# Altium PCB OBDII-Ist.PcbDoc
Units mm, origin at the board's own origin, x right, y up, seen from the top; angles counter-clockwise.
Board outline 51.9 x 40.3 mm, 2 copper layers (Top, Bottom); 77 components, 65 nets, 293 pads, 47 vias.
Unrouted connection lines stored in the file: 4.
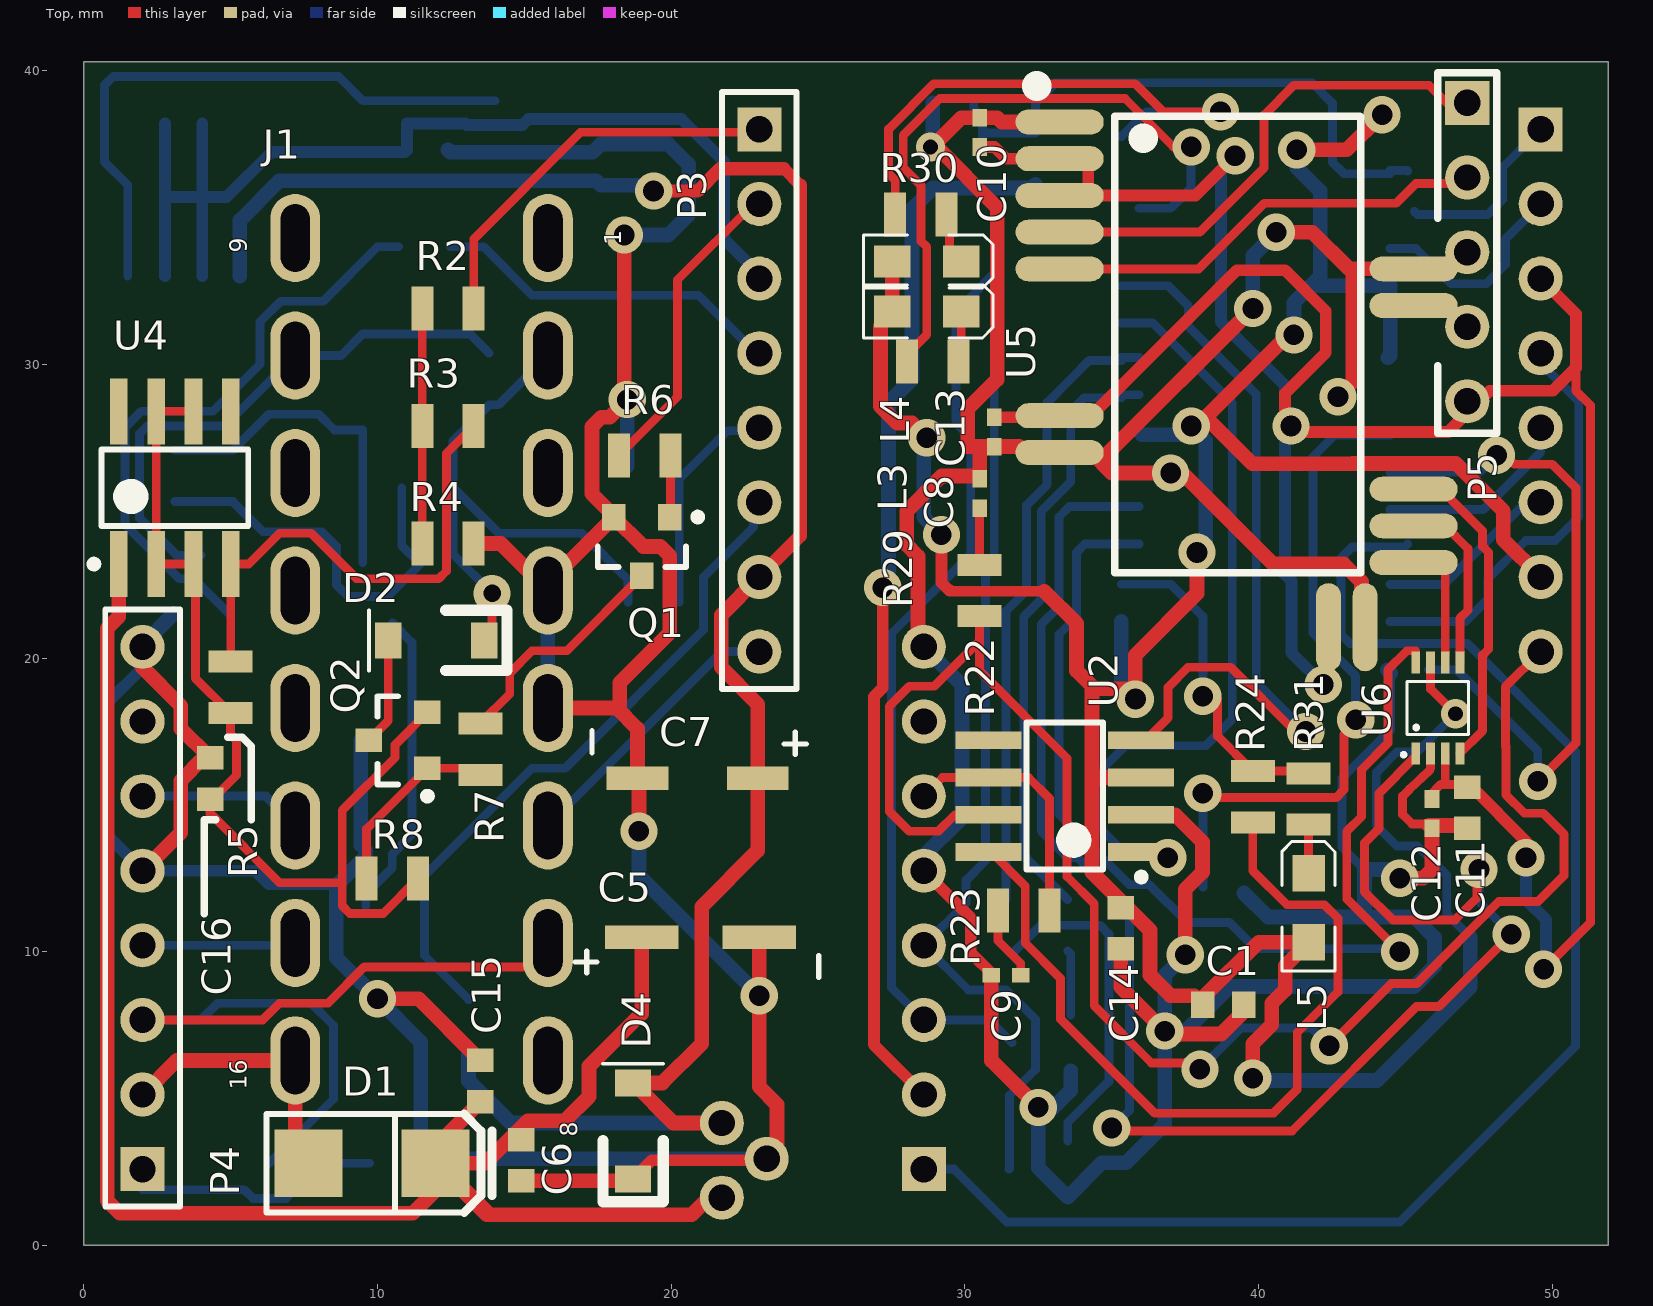
[diagram p0: Top view]
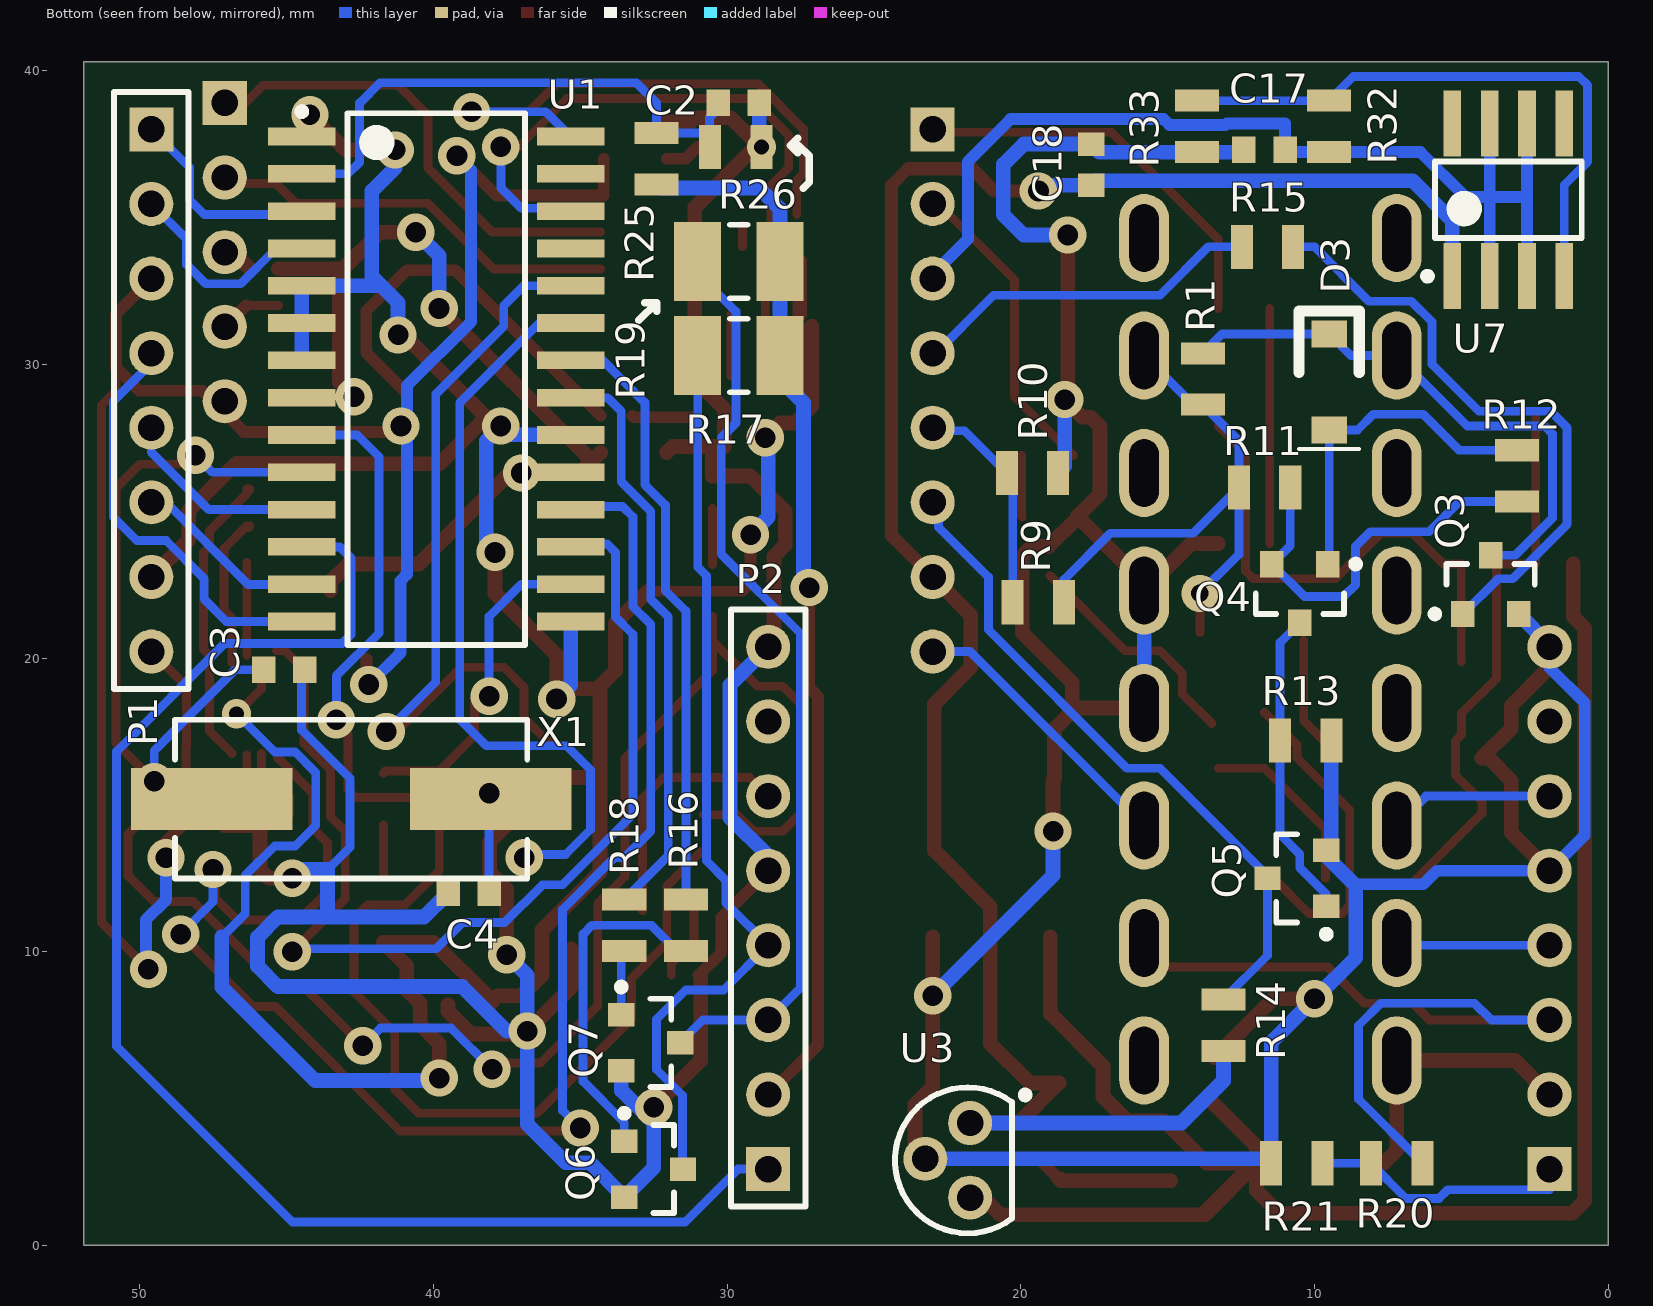
[diagram p1: Bottom view, seen from below]

## Layer stack, top to bottom
Top: signal copper 0.0356
Dielectric: core 0.32, FR-4, Dk 4.8
Bottom: signal copper 0.0356

## Board outline
0,0 0,40.3 51.9,40.3 51.9,0

## Design rules (kind name [scope] priority, off if disabled: settings)
Clearance [All] p1: gap=0.175
ComponentClearance [All] p1: gap=0.254 collisioncheckmode=3 verticalgap=0.2 showdistances=FALSE
PolygonConnect [All] p1: connectstyle=Relief reliefconductorwidth=0.254 reliefentries=4 polygonreliefangle="90 Angle" airgapwidth=0.254
RoomDefinition OBDII-Ist [InComponentClass('OBDII-Ist')] p1: confinementstyle=ConfineIn formatcopy=TRUE lockcomponents=FALSE outline -40,-40 10.8,-40 10.8,-14.6 -40,-14.6
RoutingVias [All] p1: holewidth=0.7 width=1.27 viastyle="Through Hole" minholewidth=0.3 minwidth=1.27 maxholewidth=0.7 maxwidth=1.27
SilkscreenOverComponentPads [All] p1: minsilkscreentomaskgap=0.254
SolderMaskExpansion [All] p1: expansion=0.102
Width Width_GND [InNet('GND')] p1: maxlimit=0.5 minlimit=0.2 preferedwidth=0.5
Width Width_5V [InNet('+5V')] p2: maxlimit=0.5 minlimit=0.2 preferedwidth=0.5
Width Width_3.3V [InNet('+3.3V')] p3: maxlimit=0.5 minlimit=0.2 preferedwidth=0.5
Width Width_12V [InNet('+12V')] p4: maxlimit=0.5 minlimit=0.2 preferedwidth=0.5
Width Width_VBAT [InNet('VBAT')] p5: maxlimit=0.5 minlimit=0.2 preferedwidth=0.5
Width [All] p6: maxlimit=0.3 minlimit=0.2 preferedwidth=0.3
26 further rules are at their usual default settings.

## Classes and differential pairs
component class Power_: C5 C6 C7 C15 C16 C17 C18 D1 D2 D3 D4 J1 P3 P4 Q1 Q2 Q3 Q4 Q5 R1 R2 R3 R4 R5 R6 R7 R8 R9 R10 R11 R12 R13 R14 R15 R20 R21 R32 R33 U3 U4 U7
component class OBDII-Ist: C1 C2 C3 C4 C8 C9 C10 C11 C12 C13 C14 L3 L4 L5 P1 P2 P5 Q6 Q7 R16 R17 R18 R19 R22 R23 R24 R25 R26 R29 R30 R31 U1 U2 U5 U6 X1

## Components (designator, comment, footprint, x,y, rotation, side; value= is the part's Value field where it differs from the comment)
C1 "0.1uF" 1608[0603] 38.8,8.2 r0 top
C2 "0.1uF" 1608[0603] 29.6,38.9 r180 bottom
C3 "27pF" 1608[0603] 45.072,19.6 r180 bottom
C4 "27pF" 1608[0603] 38.8,12 r0 bottom
C5 "2.2uF" Panasonic_Ñ 21,10.5 r270 top
C6 "0.1uF" 1608[0603] 14.9,2.9 r90 top
C7 "10uF" Panasonic_B 20.9,15.9 r90 top
C8 "560pF" 0402 30.5,25.6 r270 top
C9 "560pF" 0402 31.4,9.2 r0 top
C10 "X5R/16V" 0402 30.5,37.9 r90 top
C11 "0.1uF" 1608[0603] 47.1,14.9 r270 top
C12 "X5R/16V" 0402 45.9,14.7 r90 top
C13 "X5R/16V" 0402 31,27.7 r90 top
C14 "0.1uF" 1608[0603] 35.3,10.8 r270 top
C15 "0.1uF" 1608[0603] 13.5,5.6 r270 top
C16 "0.1uF" 1608[0603] 4.3,15.9 r270 top
C17 "0.1uF" 1608[0603] 11.7,37.3 r180 bottom
C18 "0.1uF" 1608[0603] 17.6,36.8 r270 bottom
D1 "FM4001-W" SMA,2.8mm 9.8,2.8 r0 top
D2 "MMSD4148T1G" SOD123 12,20.6 r0 top
D3 "MMSD4148T1G" SOD123 9.5,29.4 r90 bottom
D4 "MMSZ5232B" SOD123 18.7,3.9 r270 top
J1 "DEV-09911" "DEV-09911 - II" 11.5,20.3 r90 top
L3 "APT2012SYCK" LED-0805 28.7,31.8 r0 top
L4 "APT2012SYCK" LED-0805 28.7,33.5 r0 top
L5 "APT2012SYCK" LED-0805 41.7,11.5 r90 top
P1 "68000-108HLF" HDR1X8 49.6,38 r270 bottom
P2 "68000-108HLF" HDR1X8 28.6,2.6 r90 bottom
P3 "66951-008LF" HDR1X8 23,38 r270 top
P4 "66951-008LF" HDR1X8 2,2.6 r90 top
P5 "Header 5" HDR1X5 47.1,38.9 r270 top
Q1 "MMBT3904LT1G" SOT23 19,23.8 r270 top
Q2 "MMBT3906LT1G" SOT23 10.7,17.2 r180 top
Q3 "MMBT3904LT1G" SOT23 4,22.5 r90 bottom
Q4 "MMBT3906LT1G" SOT23 10.5,22.2 r270 bottom
Q5 "MMBT3904LT1G" SOT23 10.6,12.5 r0 bottom
Q6 "MMBT3904LT1G" SOT23 32.5,2.6 r180 bottom
Q7 "MMBT3904LT1G" SOT23 32.6,6.9 r180 bottom
R1 "22k" ERA-0805 13.8,29.5 r270 bottom
R2 "2.2k" ERA-0805 12.4,31.9 r0 top
R3 "470R" ERA-0805 12.4,27.9 r180 top
R4 "2.2k" ERA-0805 12.4,23.9 r180 top
R5 "470R" ERA-0805 5,19 r270 top
R6 "4.7k" ERA-0805 19.1,26.9 r180 top
R7 "4.7k" ERA-0805 13.5,16.9 r90 top
R8 "10k" ERA-0805 10.5,12.5 r0 top
R9 "10k" ERA-0805 19.4,21.9 r180 bottom
R10 "22k" ERA-0805 19.6,26.3 r0 bottom
R11 "10k" ERA-0805 11.7,25.8 r180 bottom
R12 "47k" ERA-0805 3.1,26.2 r270 bottom
R13 "10k" ERA-0805 10.3,17.2 r180 bottom
R14 "4.7k" ERA-0805 13.1,7.5 r90 bottom
R15 "4.7k" ERA-0805 11.6,34 r0 bottom
R16 "2.2k" ERA-0805 31.4,10.9 r90 bottom
R17 "510R" ERJ-1210 29.6,30.3 r180 bottom
R18 "2.2k" ERA-0805 33.5,10.9 r90 bottom
R19 "510R" ERJ-1210 29.6,33.5 r180 bottom
R20 "47k" ERA-0805 7.2,2.8 r180 bottom
R21 "33k" ERA-0805 10.6,2.8 r180 bottom
R22 "100R" ERA-0805 30.5,22.3 r270 top
R23 "100R" ERA-0805 32,11.4 r0 top
R24 "4.7k" ERA-0805 39.8,15.275 r90 top
R25 "47k" ERA-0805 32.4,37 r270 bottom
R26 "10k" ERA-0805 29.7,37.4 r0 bottom
R29 "470R" ERA-0805 28.9,30.1 r0 top
R30 "470R" ERA-0805 28.5,35.1 r0 top
R31 "470R" ERA-0805 41.7,15.2 r270 top
R32 "560" ERA-0805 9.5,38.1 r90 bottom
R33 "750" ERA-0805 14,38.1 r90 bottom
U1 "ELM327SM" SOIC127P1030X264-28N 39.9,29.5 r180 bottom
U2 "MCP2551-I/SN" SOIC8N 33.4,15.3 r180 top
U3 "LP2950-50LPRE3" TO-92 21.8,2.9 r180 bottom
U4 "LM317LM/NOPB" SOIC8N 3.1,25.8 r90 top
U5 "BLE112-A" "BLE112-A - II" 39.2,30.7 r0 top
U6 "TXB0102DCUR" TXB0102DCUR 46.1,18.3 r90 top
U7 "LM317LM/NOPB" SOIC8N 3.4,35.6 r90 bottom
X1 "ABLS-4.000MHZ-B2-T" HC-49/US 42.8,15.2 r180 bottom

## Footprints (in the part's own frame and the unit in brackets; to place one, negate y for a bottom-side part, rotate by r counter-clockwise, add the part's x,y. Pads: shape width x height; smd on the part's side, far side on the other; paste and mask are expansions set on the pad)
0402 [mm] "Chip Capacitor, Body 1.0x0.5mm, IPC High Density"
  rect 0.6x0.5 smd: 1(-0.5,0) 2(0.5,0)
  body extent -0.55,-0.3 0.55,0.3, height 1.3
1608[0603] [mm] "Chip Capacitor, Body 1.6x0.8mm, IPC High Density"
  rect 0.8x0.9 smd: 1(-0.7,0) 2(0.7,0)
  body extent -0.87,-0.48 0.87,0.48, height 1.3
"BLE112-A - II" [mm] "BLE112 Bluetooth Smart Module"
  round 0.85 smd: 1(-7.05,7.55) 1(-4.9,7.55) 2(-7.05,6.3) 2(-4.9,6.3) 3(-7.05,5.05) 3(-4.9,5.05) 4(-7.05,3.8) 4(-4.9,3.8) 5(-7.05,2.55) 5(-4.9,2.55) 9(-7.05,-2.45) 9(-4.9,-2.45) 10(-7.05,-3.7) 10(-4.9,-3.7) 20(3.175,-10.725) 20(3.175,-8.575) 21(4.425,-10.725) 21(4.425,-8.575) 22(5,-7.45) 22(7.15,-7.45) 23(5,-6.2) 23(7.15,-6.2) 24(5,-4.95) 24(7.15,-4.95) 29(5,1.3) 29(7.15,1.3) 30(5,2.55) 30(7.15,2.55)
  rect 2.15x0.85 smd: 1(-5.975,7.55) 2(-5.975,6.3) 3(-5.975,5.05) 4(-5.975,3.8) 5(-5.975,2.55) 9(-5.975,-2.45) 10(-5.975,-3.7) 22(6.075,-7.45) 23(6.075,-6.2) 24(6.075,-4.95) 29(6.075,1.3) 30(6.075,2.55)
  rect 0.85x2.15 smd: 20(3.175,-9.65) 21(4.425,-9.65)
  silkscreen extent -6.76,-7.8 4.27,8.78, body extent -5.98,-9.65 6.08,8.45, height 2.3
"DEV-09911 - II" [mm] "OBD-II Connector"
  oval 3x1.7 hole 1 slot 2.3 at 0 deg: 1(14,-4.3) 2(10,-4.3) 3(6,-4.3) 4(2,-4.3) 5(-2,-4.3) 6(-6,-4.3) 7(-10,-4.3) 8(-14,-4.3) 9(14,4.3) 10(10,4.3) 11(6,4.3) 12(2,4.3) 13(-2,4.3) 14(-6,4.3) 15(-10,4.3) 16(-14,4.3)
  body extent -14.85,-4.7 14.85,4.7, height 4.1
ERA-0805 [mm] "Chip Resistor; Body 2 x 1.25 mm"
  rect 0.75x1.5 smd: 1(-0.875,0) 2(0.875,0)
  body extent -1,-0.63 1,0.63, height 0.5
ERJ-1210 [mm] "Chip Resistor; Body 3.2 x 2.5 mm (LxW typ)"
  rect 1.6x2.7 smd: 1(-1.4,0) 2(1.4,0)
  silkscreen extent -0.3,-1.25 0.3,1.25
HC-49/US [mm]
  rect 5.5x2.1 smd: 1(-4.75,0) 2(4.75,0)
  silkscreen extent -6,-2.7 6,2.7, body extent -5.7,-2.4 5.7,2.4, height 4.3
HDR1X5 [mm] "Connector; Header; 5 Position"
  rect 1.5x1.5 hole 0.9: 1(0,0)
  round 1.5 hole 0.9: 2(2.54,0) 3(5.08,0) 4(7.62,0) 5(10.16,0)
  silkscreen extent -1.02,-1 11.25,1
HDR1X8 [mm] "Connector; Header; 8 Position"
  rect 1.5x1.5 hole 0.9: 1(0,0)
  round 1.5 hole 0.9: 2(2.54,0) 3(5.08,0) 4(7.62,0) 5(10.16,0) 6(12.7,0) 7(15.24,0) 8(17.78,0)
  silkscreen extent -1.27,-1.27 19.05,1.27
LED-0805 [mm] "LED, Body 2 x 1.25 mm"
  rect 1.25x1.1 smd: 1(-1.175,0) 2(1.175,0)
  silkscreen extent -2.15,-0.9 2.25,0.9, body extent -1,-0.63 1,0.63, height 0.75
Panasonic_B [mm] "Panasonic Ñ size code electrolytic capacitor"
  rect 0.8x2.1 smd paste+0: 1(0,-2.05)
  rect 0.8x2.1 smd: 2(0,2.05)
  silkscreen extent 0.82,-3.7 1.63,3.6
Panasonic_Ñ [mm] "Panasonic Ñ size code electrolytic capacitor"
  rect 0.8x2.5 smd paste+0: 1(0,-2)
  rect 0.8x2.5 smd: 2(0,2)
  silkscreen extent 0.47,-4.28 1.38,4.03
SMA,2.8mm [mm] "DO-214AC/SMA"
  rect 2.3x2.3 smd: 1(-2.15,0) 2(2.175,0)
  silkscreen extent -3.57,-1.68 4.1,1.68, body extent -2.6,-1.3 2.6,1.3, height 2.39
SOD123 [mm] "Diode SOD123, Gull-wing"
  rect 0.91x1.22 smd: 1(-1.635,0) 2(1.635,0)
  silkscreen extent -2.29,-1.02 2.41,1.02, body extent -1.85,-0.8 1.85,0.8, height 1.27
SOIC8N [mm] "SOIC, 8-Leads, Body 5.0x4.0mm (max), Pitch 1.27mm, IPC Medium Density"
  rect 2.25x0.6 smd: 1(-2.6,1.905) 2(-2.6,0.635) 3(-2.6,-0.635) 4(-2.6,-1.905) 5(2.6,-1.905) 6(2.6,-0.635) 7(2.6,0.635) 8(2.6,1.905)
  silkscreen extent -2.73,-2.5 1.3,2.88, body extent -2,-2.5 2,2.5, height 1.75
SOIC127P1030X264-28N [mm] "SOIC, 28-Leads, Body 18.1x7.6mm (max), Pitch 1.27mm, IPC Medium Density"
  rect 2.3x0.6 smd: 1(-4.575,8.255) 2(-4.575,6.985) 3(-4.575,5.715) 4(-4.575,4.445) 5(-4.575,3.175) 6(-4.575,1.905) 7(-4.575,0.635) 8(-4.575,-0.635) 9(-4.575,-1.905) 10(-4.575,-3.175) 11(-4.575,-4.445) 12(-4.575,-5.715) 13(-4.575,-6.985) 14(-4.575,-8.255) 15(4.575,-8.255) 16(4.575,-6.985) 17(4.575,-5.715) 18(4.575,-4.445) 19(4.575,-3.175) 20(4.575,-1.905) 21(4.575,-0.635) 22(4.575,0.635) 23(4.575,1.905) 24(4.575,3.175) 25(4.575,4.445) 26(4.575,5.715) 27(4.575,6.985) 28(4.575,8.255)
  silkscreen extent -4.7,-9.05 3.03,9.23, body extent -3.79,-9.04 3.8,9.04, height 2.64
SOT23 [mm] "SOT23, 3-Leads, Body 3.0x2.6mm, Pitch 0.95mm"
  rect 0.9x0.8 smd: 1(-1,0.95) 2(-1,-0.95) 3(1,0)
  silkscreen extent -1.12,-1.5 0.7,2.03, body extent -1.25,-1.46 1.23,1.46, height 1.01
TO-92 [mm] "TO, Flat Index; 3 In-Line, Axial Leads; Body Dia. 4.5mm; Leads 0.51 x 0.48 mm (max)"
  round 1.5 hole 0.9: 1(0.075,1.27) 2(-1.45,0.05) 3(0.075,-1.27)
  silkscreen extent -2.48,-2.48 2.07,2.48, body extent -2.5,-2.5 1.5,2.5, height 6.86
TXB0102DCUR [mm] "2-Bit Bidirectional Voltage-Level Translator with Auto Direction Sensing and +/-15-kV ESD Protect"
  rect 0.75x0.3 smd: 1(-1.55,0.75) 2(-1.55,0.25) 3(-1.55,-0.25) 4(-1.55,-0.75) 5(1.55,-0.75) 6(1.55,-0.25) 7(1.55,0.25) 8(1.55,0.75)
  silkscreen extent -1.6,-1.04 0.9,1.17, body extent -1.2,-1.05 1.2,1.05, height 0.9

## Part data
C1 C2 C11 C14 C15 C16: library part CGA3E2X7R1E104K080AA, "Surface-Mount Ceramic Multilayer Capacitor, 0.1uF, X7R, 10% Tolerance, 0603 Size, 25V"
C3 C4: library part CC0603JRNPO9BN270, "Surface-Mount Ceramic Multilayer Capacitor, 27pF, 5% Tolerance, 0603 Size, 50V"
C5: library part EEE-1HA2R2NR, "CAP ELECT 2.2UF SV 50V SMD"
C6 C17 C18: library part C0603C104K5RACTU, "Surface-Mount Ceramic Multilayer Capacitor, 0.1uF, 10% Tolerance, 0603 Size, 50V"
C7: library part EEE-1AA100NR, "CAP ELECT 10UF SV 10V SMD"
C8 C9: library part C0402C561J5GACTU, "Surface-Mount Ceramic Multilayer Capacitor, 560pF, 5% Tolerance, 0402 Size, 50V"
C10 C12 C13: library part "Cap Semi", "Capacitor (Semiconductor SIM Model)"
D1: "1 Amp 50V  Rectifier"
D2 D3: "High Conductance Fast Diode"
D4: "Zener Diodes 5.6 Volt 0.5W 5%"
J1: library part OBDII_DEV-09911, "OBD-II Connector"
L3 L4 L5: "Typical BLUE SiC LED"
P1 P2: "Header, 8-Pin, 2.54 pitch, 1 row"
P3 P4: "Connector, 8-Pin, 2.54 pitch, 1 row"
P5: "Header, 5-Pin"
Q1 Q3 Q5 Q6 Q7: library part MMBT3904L, "NPN 3904 General Purpose Amplifier"
Q2 Q4: library part MMBT3906L, "PNP 3906 General Purpose Amplifier"
R1 R10: library part ERA6AEB223V, "Rectangular Thick Film Chip Resistor, 22 kOhm, 0.1% Tolerance, 0805 Size, 0.125 W"
R2 R4 R16 R18: library part ERA6AEB222V, "Rectangular Thick Film Chip Resistor, 2.2 kOhm, 0.1% Tolerance, 0805 Size, 0.125 W"
R3 R5 R29 R30 R31: library part ERA6AEB471V, "Rectangular Thick Film Chip Resistor, 470 Ohm, 0.1% Tolerance, 0805 Size, 0.125 W"
R6 R7 R14 R15 R24: library part ERA6AEB472V, "Rectangular Thick Film Chip Resistor, 4.7 kOhm, 0.1% Tolerance, 0805 Size, 0.125 W"
R8 R9 R11 R13 R26: library part ERA6AEB103V, "Rectangular Thick Film Chip Resistor, 10 kOhm, 0.1% Tolerance, 0805 Size, 0.125 W"
R12 R20 R25: library part ERA6AEB473V, "Rectangular Thick Film Chip Resistor, 47 kOhm, 0.1% Tolerance, 0805 Size, 0.125 W"
R17 R19: library part ERJ14NF5100U, "Rectangular Thick Film Chip Resistor, 510 Ohm, 1% Tolerance, 1210 Size, 0.5 W"
R21: library part ERA6AEB333V, "Rectangular Thick Film Chip Resistor, 33 kOhm, 0.1% Tolerance, 0805 Size, 0.125 W"
R22 R23: library part ERA6AEB101V, "Rectangular Thick Film Chip Resistor, 100 Ohm, 0.1% Tolerance, 0805 Size, 0.125 W"
R32: library part ERJ6ENF5600V, "Rectangular Thick Film Chip Resistor, 560 Ohm, 1% Tolerance, 0805 Size, 0.125 W"
R33: library part ERJ6ENF7500V, "Rectangular Thick Film Chip Resistor, 750 Ohm, 1% Tolerance, 0805 Size, 0.125 W"
U1: library part ELM327_SOIC, "OBDII Interpreter IC"
U2: "IC TRANSCEIVER CAN HI-SPD 8-SOIC"
U3: "Adjustable Micropower Voltage Regulator With Shutdown; 5V; 100 mA"
U4 U7: library part LM317LM, "3-terminal adjustable regulator in SO8"
U5: "BLE112 Bluetooth Smart Module"
U6: "2-Bit Bidirectional Voltage-Level Translator with Auto Direction Sensing and +/-15-kV ESD Protect"
X1: "CRYSTAL 4.000 MHZ 18PF SMD"

## Via types
v1: diameter 1.27, hole 0.7, Top to Bottom, tented both sides, 34 vias
v2: diameter 1.27, hole 0.711, Top to Bottom, tented both sides, 6 vias
v3: diameter 1.27, hole 0.7, Top to Bottom, tented top, 3 vias
v4: diameter 1.27, hole 0.6, Top to Bottom, tented both sides, 1 vias
v5: diameter 1.27, hole 0.7, Top to Bottom, tented bottom, 1 vias
v6: diameter 1, hole 0.5, Top to Bottom, tented top, 1 vias
v7: diameter 1, hole 0.5, Top to Bottom, tented both sides, 1 vias

## Nets (pads, with @x,y where several pads share a name; then routed paths per layer and width w, separated by ;. In a path a pad name is that pad's centre, name@x,y a point inside that pad or via, vN(x,y) a via of type N, cw(c..) or ccw(c..) an arc to the next point about the centre after c; other vN are vias at no path point)
+3.3V: C10.1 C11.1 C12.2 C13.2 C17.2 P1.3 P3.3 P5.5 R32.1 U5.2 U5.3 U5.9 U5.20 U6.3 U7.2 U7.3 U7.6 U7.7 | length 128.4
  Top w0.3: C12.2@45.8,15.3 46.2,15.7 C11.1@47.1,15.7 ; 46.35,15.7 U6.3@46.35,16.7 ; v1(49.7,9.4) 51.3,11 51.3,28.6 50.8,29.1 50.8,29.883
  Top w0.4: 30.8,37.4 31,37.4 31.4,37 U5.2@32.05,37 ; C13.2 33.175,28.2 U5.9@33.225,28.25 ; U5.2@34.2,37 34.2,35.75 34.3,35.75 37.85,35.75 v2(39.2,37.1) ; U5.9@34.3,28.25 39.25,33.2 40.9,33.2 42.285,31.815 42.285,30.4 40.9,29.015 40.9,27.7 46.46,27.7 47.86,29.1 50.017,29.1 50.8,29.883 50.8,31.72 P1.3 ; v1@42.275,18.775 U5.20@42.275,19.975 ; C11.1 47.265,15.6 49.1,13.765 v1(49.1,13.2)
  Bottom w0.4: U7.3 2.765,35.7 ; U7.6 2.765,35.7 ; U7.2 4.035,35.7 ; U7.7 4.035,35.7 ; P3.3 23,33.06 21.8,34.26 21.8,36.9 20.35,38.35 15.136,38.35 14.936,38.15 13.036,38.15 12.986,38.2 11,38.2 C17.2 10.925,37.225 R32.1 6.391,37.225 4.866,35.7 4.035,35.7 ; v2(39.2,37.1) 38.715,36.615 38.715,31.451 40.9,29.266 40.9,22.849 41.115,22.634 41.115,20.185 v1(42.2,19.1) ; v1(49.1,13.2) 49.1,11.776 49.785,11.091 49.785,9.485 v1(49.7,9.4) ; 2.765,35.7 4.035,35.7
  other v1: 41.1,27.9
+5V: C1.1 C7.1 C14.1 C18.2 D4.1 L3.1 L4.1 L5.1 P1.7 P3.7 R14.1 U1.1 U1.5 U1.6 U1.7 U1.15 U1.20 U2.3 U3.1 U6.7 U7.1 | length 188
  Top w0.3: U6.7 45.85,18.95 v7(46.7,18.1)
  Top w0.35: 29.5,22.3 29.525,22.275 32.703,22.275
  Top w0.4: 23.84,36.66 24.4,36.1 ; v1@29.2,23.778 29.2,22.572 29.472,22.3 29.5,22.3
  Top w0.45: v2(19.4,35.9) 20.896,35.9 21.656,36.66 23.84,36.66 ; P3.7 24.4,24.16 24.4,36.1
  Top w0.5: U3.1 20.065,4.17 D4.1 19.7,5.535 21.035,6.87 21.035,11.535 22.95,13.45 C7.1 22.95,18.432 21.7,19.682 21.7,21.46 P3.7 ; L3.1@27.125,31.3 27.125,28.575 27.7,28 28.2,28 v1(28.7,27.5) ; L3.1@27.525,31.7 L4.1 ; v1@29.2,23.778 v1(29.2,24.2) ; 32.703,22.275 33.8,21.178 33.8,19.571 34.371,19 34.325,18.954 ; v2@35.654,18.954 34.325,18.954 ; v2(35.8,18.6) 35.8,20.1 37.9,22.2 v2(37.9,23.6) ; U2.3 34.535,15.935 34.325,15.725 ; v1(39.8,5.7) 39.8,6.872 40.45,7.522 40.45,8.25 40.9,8.7 40.9,9.525 L5.1 39.997,10.325 38.1,8.428 C1.1 37.8,8.5 37,8.5 36.3,9.2 36.3,10.728 34.325,12.703 34.325,15.725 ; v1@41.067,31.133 v1@41.285,31.351 ; v1(41.2,31) 41,31 38.2,28.2 39.785,26.615 43.19,26.615 43.2,26.625 46.712,26.625 48.325,25.012 48.325,24.035 P1.7 ; v1(41.3,37.3) 43,37.3 v3(44.2,38.5) ; 34.325,15.725 34.325,18.954
  Bottom w0.3: v7(46.7,18.1) 45.4,16.8 44.7,16.8 44,16.1 44,14.3 44.7,13.6 45.4,13.6 46.4,12.6 46.4,11.3 47.2,10.5
  Bottom w0.5: U7.1 5.305,34.893 6.662,36.25 17.45,36.25 C18.2 19.2,36.1 v2(19.4,35.9) ; R14.1 13.1,5.6 14.53,4.17 U3.1 ; v1@28.6,27 28.6,24.8 v1(29.2,24.2) ; U1.15 35.325,19.075 v2(35.8,18.6) ; U1.20@36.02,27.6 v1@37.6,27.6 ; v1(37.7,27.9) 37.8,27.8 38.2,27.4 38.2,23.9 v2(37.9,23.6) ; v1(39.8,5.7) 39.885,5.615 44.015,5.615 47.2,8.8 47.2,10.5 ; v1(41.2,31) 41.2,32.1 41.775,32.675 ; v1(41.3,37.3) 41.3,36.7 42.1,35.9 42.1,33 41.775,32.675 ; U1.7@44.4,30.225 44.475,30.3 U1.6 U1.5 41.775,32.675
+12V: C5.1 C6.2 C15.2 D1.2 U3.3 U4.1 | length 62.6
  Top w0.5: U4.1 1.195,21.413 0.8,21.018 0.8,1.522 1.222,1.1 11.2,1.1 11.975,1.875 D1.2 ; C15.2 11.975,3.375 D1.2 ; C5.1 19,7.9 17.2,6.1 17.2,5.07 16.38,4.25 15.122,4.25 13.672,2.8 12.072,2.8 13.822,1.05 ; U3.3 21.28,1.63 20.7,1.05 13.822,1.05 ; D1.2 13.725,1.05 13.822,1.05
"CAN-H 6": P1.8 R22.2 U2.7 | length 55.8
  Top w0.3: R22.2 30.5,20.583 ; U2.7 29.662,14.665 29.097,14.1 28.103,14.1 27.425,14.778 27.425,18.362 28.103,19.04 28.957,19.04 30.5,20.583 ; v1(38,6) 37.785,6.215 36.351,6.215 34.4,8.166 34.4,11.636 33.475,12.561 33.475,16.591 30.5,19.566 30.5,20.583 ; v1(42.4,6.8) 44.515,8.915 45.381,8.915 48.181,11.715 49.515,11.715 50.4,12.6 50.4,14 49.685,14.715 49.051,14.715 48.415,15.351 48.415,16.985 48.4,17 48.4,19.02 P1.8
  Bottom w0.3: v1(38,6) 39.4,7.4 41.8,7.4 v1(42.4,6.8)
CAN-H_P: J1.6 P3.8 | length 9.7
  Bottom w0.3: J1.6 21.72,20.22 P3.8
"CAN-L 14": P2.6 R23.2 U2.6 | length 8.7
  Top w0.3: P2.6 29.235,15.935 U2.6 32.165,15.935 32.875,15.225 R23.2
CAN-L_P: J1.14 P4.6 | length 5.6
  Bottom w0.3: P4.6 6.2,15.3 J1.14
GND: C1.2 C2.2 C3.2 C4.2 C5.2 C6.1 C7.2 C8.1 C9.1 C10.2 C11.2 C12.1 C13.1 C14.2 C15.1 C16.1 C17.1 C18.1 D4.2 J1.4 J1.5 P2.5 P2.8 P4.5 P4.8 P5.3 Q1.2 Q3.2 Q5.2 Q6.2 Q7.2 R4.1 R10.1 R13.2 R21.1 R26.1 R33.1 U1.8 U1.19 U2.2 U3.2 U5.1 U5.10 U5.21 U5.30 U6.2 | length 276.6
  Top w0.3: C12.1@45.8,14.3 45.75,14.35 45.222,14.35 44.9,14.672 44.9,15.3 45.137,15.537 45.825,16.175 45.85,16.25 U6.2
  Top w0.4: D4.2 19.335,2.9 U3.2@22.994,2.9 ; P2.5 30.2,11.16 30.2,9.972 C9.1@30.972,9.2
  Top w0.5: P4.5 3.3,14.06 3.3,15.828 4.072,16.6 C16.1 3.3,17.6 3.3,18.378 2,19.678 P4.8 ; v1(10,8.4) 11.4,8.4 C15.1@13.4,6.4 ; R4.1 14.2,23.9 J1.4 ; C6.1 D4.2@18.635,2.2 ; J1.5 18.15,18.3 ; J1.4@15.8,22.55 Q1.2 ; v1@18.4,28.9 v2(18.4,34.4) ; v1(18.5,28.8) 17.9,28.2 17.622,28.2 17.3,27.878 17.3,25.6 18.05,24.85 Q1.2 ; D4.2@18.635,2.265 D4.2 ; C7.2 18.85,17.6 18.15,18.3 ; v1(18.9,14.1) C7.2@18.9,15.85 ; U3.2@22.994,2.9 23.094,2.8 23.6,3.306 23.6,4.8 23,5.4 C5.2 ; P2.8 28.4,20.58 28.4,23.466 28.015,23.851 28.015,25 29.215,26.2 30.5,26.2 30.5,27.1 30.4,27.2 ; v6@28.7,37.4 v6@28.762,37.337 ; v6(28.825,37.4) 29.036,37.4 31.1,35.336 31.1,29.486 30.1,28.486 30.1,27.2 30.4,27.2 ; v6@28.94,37.46 29.88,38.4 C10.2 31.1,38.4 31.25,38.25 U5.1@32.05,38.25 ; C9.1 30.9,6.3 v1(32.5,4.7) ; U5.10@32.05,27 31.85,27.2 C13.1 30.4,27.2 ; U5.10@34.3,27 35,26.3 v1(37,26.3) 37.4,26.3 40.5,23.2 42.9,23.2 43.5,22.6 U5.21@43.5,22.3 ; 34.8,26.9 v2(39.8,31.9) ; C14.2 35.3,8.8 v1(36.8,7.3) 36.9,7.2 38.728,7.2 39.5,7.972 C1.2 ; U2.2 37.159,14.665 38.085,13.739 38.085,12.709 37.5,12.124 v1(37.5,9.9) ; v1(40.6,34.5) 41.825,34.5 43.075,33.25 ; v1(42.7,28.9) 43.2,29.4 43.2,33.25 44.2,33.25 U5.30@45.275,33.25 ; v1(44.8,12.5) 45.6,12.5 45.9,12.8 C12.1@45.9,14.3 ; C12.1@45.8,14.3 C12.1@45.9,14.3 ; U5.30@46.25,33.25 46.82,33.82 P5.3@47.3,33.82 ; C11.2@47.1,14.3 C12.1@45.9,14.3 ; Q1.2 19.05,23.8 19.628,23.8 19.95,23.478 19.95,20.86 18.25,19.16 18.25,18.4 18.15,18.3
  Bottom w0.3: 43.6,12.8 42.834,13.566 42.834,15.9 44.485,17.551 C3.2@44.485,19.487
  Bottom w0.4: P4.8@2,19.678 0.8,18.478 0.8,13.96 P4.5 5.84,12.76 6.3,12.3 8.6,12.3
  Bottom w0.5: P4.8 2,20.45 Q3.2 ; Q5.2@9.425,13.625 R13.2 ; Q5.2 9.6,13.254 8.6,12.254 8.6,9.8 v1(10,8.4) 11.475,6.925 R21.1 11.625,2.95 U3.2 U3.2@23.45,2.95 ; C17.1 12.475,37.225 R33.1 17.325,37.225 C18.1 19.9,37.5 20.6,36.8 20.6,35.1 19.9,34.4 v2(18.4,34.4) ; J1.5 J1.4 ; R10.1@18.5,26.525 v1(18.5,28.8) ; v1(18.9,14.1) 18.9,12.6 v1(23,8.5) ; P2.5 28.6,13.262 29.9,14.562 29.9,19.08 P2.8 ; R26.1@28.9,37.6 C2.2 ; Q7.2 33.6,5.278 32.5,4.178 32.5,2.65 Q6.2 34.665,2.815 35.491,2.815 36.8,4.124 v1(36.8,7.3) ; v1(37.5,9.9) 36.8,9.2 v1(36.8,7.3) ; C4.2 40.315,11.185 43.6,11.185 ; v2(39.8,31.9) 39.8,33.7 v1(40.6,34.5) ; C3.2 C3.2@44.485,19.487 ; v1(44.8,12.5) 44.5,12.8 43.6,12.8 43.6,11.185 ; v1(36.8,7.3) 37.5,7.3 39.015,8.815 45.291,8.815 45.985,9.509 45.985,10.491 45.291,11.185 43.6,11.185
ISO_IN: P2.1 U1.12 | length 50.1
  Bottom w0.3: P2.1 29.626,2.6 31.426,0.8 44.8,0.8 50.785,6.785 50.785,16.815 47.1,20.5 43.1,20.5 42.8,20.8 42.8,23.4 43.185,23.785 U1.12 ; U1.12@44.475,23.79 44.98,23.79 U1.12@45.075,23.885
ISO_IN_P: P4.1 R20.1 R21.2 | length 8.4
  Bottom w0.3: P4.1@2,1.9 5.464,1.9 5.764,1.6 6.886,1.6 R20.1@8.086,2.8 ; R20.1 R20.1@8.086,2.8 ; R21.2 R20.1@8.086,2.8
ISO_K: P2.3 Q7.3 R19.1 | length 31.5
  Bottom w0.3: R19.1 31,33.1 29.7,31.8 29.7,28 30.2,27.5 30.2,23.536 27.5,20.836 27.5,8.78 P2.3 30.82,7.68 Q7.3
ISO_K_P: J1.7 P4.3 R20.2 | length 26.4
  Top w0.3: P4.3 6.092,7.68 6.662,8.25 8.316,8.25 9.551,9.485 J1.7@14.985,9.485
  Bottom w0.3: P4.3 3.985,7.68 4.555,8.25 7.738,8.25 8.5,7.488 8.5,4.986 6.325,2.811 R20.2
ISO_L: P2.4 Q6.3 R17.1 | length 31.4
  Bottom w0.3: R17.1 31,23.1 30.7,22.8 30.7,13.1 30.04,12.44 30.04,11.66 P2.4 30.12,8.7 31.4,8.7 32.4,7.7 32.4,5.993 31.515,5.108 31.515,2.615 Q6.3
ISO_L_P: J1.15 P4.4 | length 5.1
  Bottom w0.3: P4.4 J1.15@7.12,10.22
J1850_BUS+: P1.2 U1.4 | length 7.3
  Bottom w0.3: U1.4 45.355,33.945 46.555,32.745 47.745,32.745 48.4,33.4 48.4,34.26 P1.2
J1850_BUS+_P: P3.2 R6.2 | length 10.5
  Top w0.3: R6.2 18.225,26.911 20.214,28.9 20.214,32.874 P3.2@22.8,35.46
J1850_BUS-: P1.4 U1.14 | length 14.4
  Bottom w0.3: U1.14 47.045,21.245 47.8,22 47.8,22.7 49.1,24 50.1,24 50.9,24.8 50.9,28.74 49.6,30.04 P1.4
J1850_BUS-_P: P3.4 R15.2 | length 12.1
  Bottom w0.3: R15.2 13.612,34 15.262,32.35 20.93,32.35 P3.4@23,30.28
J1850_VOLTS: P1.1 U1.3 | length 6.2
  Bottom w0.3: U1.3@45.3,35.2 45.4,35.1 47.8,35.1 48.3,35.6 48.3,36.7 P1.1
J1850_VOLTS_P: P3.1 R2.2 | length 13.6
  Top w0.3: R2.2 13.275,34.263 16.912,37.9 P3.1@23,37.9
NetC2_1: C2.1 R25.1 R26.2 U1.2 | length 19.5
  Bottom w0.3: C2.1 30.3,38.7 30.6,38.4 R26.2@30.6,37.65 ; R26.2@30.7,37.875 R25.1 32.4,38.9 33.085,39.585 41.815,39.585 42.508,38.892 42.508,36.885 42.908,36.485 U1.2 ; U1.2@44.475,36.6 45.06,36.6 U1.2@45.075,36.585
NetC3_1: C3.1 U1.10 X1.1 | length 23.5
  Top w0.3: v1(48.1,26.9) 48.4,26.9 48.7,26.6 49.997,26.6 50.8,25.797 50.8,17.1 v3(49.5,15.8)
  Bottom w0.3: U1.10 47.525,26.325 v1(48.1,26.9) ; C3.1 46.738,19.6 49.5,16.838 v3(49.5,15.8)
NetC4_1: C4.1 U1.9 X1.2 | length 22.4
  Top w0.3: v3@38,15.25 42.636,15.25 42.9,15.514 42.9,17.4
  Bottom w0.3: C4.1@38.1,12.2 X1.2@38.1,15.15 ; v1@43.285,17.815 v1@43.285,17.9 ; v1(43.3,17.9) 43.3,19.4 41.85,20.85 41.85,26.85 42.595,27.595 U1.9
  other v3: 38.1,15.4
NetC8_2: C8.2 R22.1 | length 1.9
  Top w0.3: R22.1 C8.2
NetC9_2: C9.2 R23.1 | length 2.5
  Top w0.3: R23.1 31.125,10.375 31.9,9.6 C9.2
NetC16_2: C16.2 Q2.2 R5.2 R8.2 U4.2 U4.3 U4.6 U4.7 | length 33.7
  Top w0.3: U4.6 U4.7 U4.2 U4.3 3.8,23.135 3.8,19.314 R5.2@5,18.114 ; R5.2 R5.2@5,18.114 ; R8.2@11.375,12.489 10.186,11.3 9.064,11.3 8.8,11.564 8.8,12.3 ; Q2.2 10.6,17.05 10.6,16.614 8.8,14.814 8.8,12.3 ; R5.2@5,18.114 5,17.386 5.2,17.186 5.2,16.014 4.386,15.2 C16.2 4.3,14.712 6.662,12.35 8.75,12.35 8.8,12.3
NetD2_1: D2.1 Q2.3 | length 3.7
  Top w0.3: Q2.3 10.365,17.865 D2.1
NetD2_2: D2.2 J1.2 R1.2 R9.2 R11.1 | length 19.5
  Top w0.3: D2.2@13.9,20.865 v4(13.9,22.2)
  Bottom w0.3: v4(13.9,22.2) 12.575,23.525 R11.1 ; J1.2 14.125,28.625 R1.2 12.575,27.4 R11.1 ; R9.2 18.525,22.675 16.95,24.25 14.125,24.25 R11.1
NetD3_1: D3.1 Q4.1 R12.1 | length 11.6
  Bottom w0.3: R12.1 5.075,27.075 6.3,28.3 8,28.3 8.535,27.765 D3.1 Q4.1@9.5,23.25
NetD3_2: D3.2 J1.10 Q3.3 R1.1 | length 19.1
  Bottom w0.3: Q3.3 3.164,23.5 1.9,24.764 1.9,27.636 2.164,27.9 4.8,27.9 J1.10 8.765,30.3 D3.2 13.14,31.035 R1.1
NetL3_2: L3.2 R29.2 | length 2.1
  Top w0.3: R29.2@29.875,29.6 L3.2@29.875,31.7
NetL4_2: L4.2 R30.2 | length 0.7
  Top w0.3: L4.2@29.475,34 R30.2@29.475,34.725
NetL5_2: L5.2 R31.2 | length 1.7
  Top w0.3: L5.2 R31.2
NetP5_1: P5.1 U5.4 | length 16.5
  Top w0.3: U5.4@34.3,34.5 37.993,34.5 40.185,36.692 40.185,38.485 41.2,39.5 45.8,39.5 46.6,38.7 P5.1@47.3,38.7
NetP5_2: P5.2 U5.5 | length 14.2
  Top w0.3: U5.5@34.3,33.25 37.957,33.25 40.192,35.485 44.685,35.485 45.36,36.16 P5.2@47.3,36.16
NetP5_4: P5.4 U5.29 | length 2.4
  Top w0.3: U5.29@45.275,32 46.35,32 U5.29@46.38,32
  Top w0.4: U5.29@46.38,32 P5.4@47.3,31.08
NetQ1_1: Q1.1 R6.1 | length 2.1
  Top w0.3: Q1.1 19.975,24.825 R6.1
NetQ1_3: Q1.3 R7.2 | length 8
  Top w0.3: R7.2 14.5,18.775 14.5,19.488 15.262,20.25 16.45,20.25 Q1.3
NetQ2_1: Q2.1 R7.1 R8.1 | length 6.2
  Top w0.3: R8.1 9.625,14.175 Q2.1 R7.1@13.275,16.25
NetQ3_1: Q3.1 R15.1 | length 20.8
  Bottom w0.3: Q3.1 3.75,22.7 3.257,22.7 1.4,24.557 1.4,27.844 1.956,28.4 4.4,28.4 6,30 6,31.447 6.703,32.15 8.15,32.15 10,34 R15.1
NetQ4_2: Q4.2 R11.2 R12.2 | length 13.8
  Bottom w0.3: R12.2 5.075,25.325 6.1,24.3 8.1,24.3 8.6,23.8 8.6,22.5 9,22.1 10.35,22.1 Q4.2 10.825,23.825 R11.2
NetQ4_3: Q4.3 Q5.1 R13.1 | length 10.6
  Bottom w0.3: Q5.1 9.6,11.964 10.5,12.864 10.5,13.325 11.175,14 R13.1 11.175,20.525 Q4.3
NetQ6_1: Q6.1 R16.1 | length 11.3
  Bottom w0.3: R16.1@31.7,10.025 32.575,10.9 34.6,10.9 34.9,10.6 34.9,5.588 33.5,4.188 Q6.1
NetQ7_1: Q7.1 R18.1 | length 2.2
  Bottom w0.3: R18.1 33.6,9.925 Q7.1
NetR2_1: R2.1 R3.2 R4.2 | length 8
  Top w0.3: R4.2 R3.2 R2.1
NetR3_1: R3.1 R5.1 U4.4 | length 17.2
  Top w0.3: R5.1 5.005,19.88 U4.4 5.612,23.2 6.662,24.25 7.738,24.25 9.288,22.7 12.086,22.7 12.35,22.964 12.35,26.975 R3.1
NetR16_2: R16.2 U1.22 | length 21.2
  Bottom w0.3: R16.2 31.4,21.6 32.1,22.3 32.1,25.207 32.796,25.904 32.796,28.696 33.6,29.5 34.235,30.135 U1.22 ; U1.22@35.325,30.235 U1.22@35.925,30.235
NetR18_2: R18.2 U1.21 | length 20.4
  Bottom w0.3: R18.2 32,13.275 32,21.4 32.6,22 32.6,25 33.6,26 33.6,28.4 34.065,28.865 U1.21 ; U1.21@35.325,28.965 U1.21@35.925,28.965
NetR24_1: R24.1 U2.8 | length 28.1
  Top w0.3: U2.8 30.891,13.395 32.05,12.236 32.05,10.299 33.25,9.099 33.25,7.716 36.466,4.5 40.5,4.5 41.315,5.315 41.315,7.249 42.7,8.634 42.7,11.136 42.236,11.6 40.964,11.6 39.8,12.764 R24.1
NetR24_2: R24.2 R31.1 U1.16 | length 10.8
  Top w0.3: v1@38.6,18.6 38.6,17.35 R24.2 41.625,16.15 R31.1
  Bottom w0.3: U1.16 37,22.515 38.1,21.415 v1(38.1,18.7)
NetR29_1: R29.1 U1.26 | length 23.3
  Top w0.3: R29.1 28.025,30.33 28.7,31.005 28.7,34 28.5,34.2 28.5,36.1 27.9,36.7 27.9,37.802 29.148,39.05 35.45,39.05 37.1,37.4 v1(37.7,37.4) ; R29.1@28.125,29.6 R29.1@28.125,30.1
  Bottom w0.3: U1.26@35.925,35.315 37,35.315 37.7,36.015 v1(37.7,37.4)
NetR30_1: R30.1 U1.28 | length 19.1
  Top w0.3: R30.1 27.625,36.268 27.4,36.493 27.4,38.009 28.941,39.55 35.8,39.55 36.75,38.6 v1(38.7,38.6)
  Bottom w0.3: U1.28 36.17,38.6 v1(38.7,38.6)
NetR32_2: R32.2 R33.2 U7.4 | length 20.6
  Bottom w0.3: U7.4 1.495,36.105 0.7,36.9 0.7,39.5 1,39.8 8.675,39.8 R32.2 R33.2
NetU1_17: U1.17 U6.8 | length 37.1
  Top w0.3: v1(44.8,10) 43,11.8 43,14.1 43.5,14.6 43.5,16.2 44.4,17.1 44.4,19.6 45.05,20.25 45.35,20.25
  Bottom w0.3: U1.17@35.925,23.885 34.085,23.885 33.8,23.6 33.8,21.4 33.2,20.8 33.2,14.685 35.6,12.285 36.281,12.285 37.566,11 39,11 39.9,10.1 44.7,10.1 v1(44.8,10)
NetU1_18: U1.18 U6.1 | length 55.4
  Top w0.3: v1(35,4) 35.1,3.9 41.134,3.9 45.367,8.133 46.133,8.133 v1(48.6,10.6) ; U6.1@45.3,16.6 44.1,15.4 44.1,14.2 43.6,13.7 43.6,12.049 44.564,11.085 46.685,11.085 47.434,11.834 v1@47.434,12.8
  Bottom w0.3: v1(35,4) 35.6,4.6 35.6,11.436 33.836,13.2 33.5,13.2 32.6,14.1 32.6,21.151 33.2,21.751 33.2,24.8 33.555,25.155 U1.18@35.925,25.155 ; v1(47.5,12.8) 47.5,11.7 v1(48.6,10.6)
NetU1_23: U1.23 U2.1 | length 25.5
  Bottom w0.3: U1.23 36.388,31.405 39.1,28.693 39.1,17.915 38.2,17.015 35.465,17.015 34.65,16.2 34.65,14.164 35.5,13.314 36.786,13.314 v5(36.9,13.2)
NetU1_24: U1.24 U2.4 | length 26.8
  Top w0.3: U2.4 36.149,17.205 36.917,17.973 36.917,19.008 37.594,19.685 39.049,19.685 41.234,17.5 v1(41.6,17.5)
  Bottom w0.3: U1.24 36.925,32.675 37.6,32 37.6,31.3 39.915,28.985 39.915,19.185 v1(41.6,17.5)
NetU5_22: U5.22 U6.6 | length 3.1
  Top w0.3: U6.6@46.35,20.1 U5.22@46.35,23.25
NetU5_23: U5.23 U6.5 | length 5.2
  Top w0.3: U5.23@46.25,24.5 46.25,24.487 U5.23@46.294,24.444 ; U5.23@46.35,24.5 47.125,23.725 47.125,21.625 46.85,21.35 U6.5
NetU5_24: U5.24 U6.4 | length 10.2
  Top w0.3: U5.24@46.25,25.75 46.25,25.737 U5.24@46.35,25.637 ; U5.24@46.35,25.75 U5.24@46.35,25.637 ; U6.4 47.625,17.525 47.625,20.1 47.825,20.3 47.825,23.6 47.625,23.8 47.625,24.321 46.35,25.596 U5.24@46.35,25.637
PWM_IN: P1.6 U1.13 | length 6.3
  Bottom w0.3: U1.13 44.49,22.5 46.3,22.5 49.1,25.3 P1.6
PWM_IN_P: P3.6 Q5.3 R14.2 | length 22.8
  Bottom w0.3: R14.2 11.6,9.875 Q5.3 11.6,12.588 15.262,16.25 16.386,16.25 21.1,20.964 21.1,22.757 22.8,24.457 P3.6@22.8,25.3
VBAT: D1.1 J1.16 P2.2 P4.2 R17.2 R19.2 R25.2 | length 45.3
  Top w0.4: v1(27.2,22.4) 27.2,18.986 26.9,18.686 26.9,6.84 P2.2
  Top w0.5: P4.2 3.16,6.3 J1.16 7.2,3.25 D1.1
  Bottom w0.5: v1(27.2,22.4) 27.4,22.6 27.4,28.7 28.2,29.5 R17.2 R19.2 28.2,35.3 28.9,36 32.275,36 R25.2
VPW_IN: P1.5 U1.11 | length 6.8
  Top w0.3: P1.5 P1.5@49.606,27.84
  Bottom w0.3: U1.11 47.648,25.055 49.6,27.007 P1.5
VPW_IN_P: P3.5 R9.1 R10.2 | length 7.6
  Bottom w0.3: R9.1 20.275,26.1 R10.2 21.915,27.74 P3.5@23,27.74
pads on no net: J1.1 J1.3 J1.8 J1.9 J1.11 J1.12 J1.13 P2.7 P4.7 U1.25 U1.27 U2.5 U4.5 U4.8 U7.5 U7.8

## Silkscreen, mask and mechanical layers (free items; w line width, h text height)
Top Overlay:
  lines w0.254: 4.1,11.3 4.1,14.5 4.5,14.5 ; 4.9,17.3 5.4,17.3 5.7,17 5.7,14.5
Bottom Overlay:
  lines w0.254: 27.4,36 27.2,36.2 27.2,37.1 27.55,37.45 27.85,37.45 ; 27.6,37.2 27.85,37.45 ; 27.6,37.7 27.85,37.45 ; 32.4,31.8 32.4,32.1 ; 32.8,32.1 32.4,32.1 ; 33,31.5 32.4,32.1 ; 27.85,37.45 27.85,37.45
Board:
  the board outline again, w0.1
Plata:
  lines w0.1: 25,0 25,40.3 ; 26.1,0 26.1,40.3 ; 0,0 51.9,0 51.9,40.3 0,40.3 0,0

## Text inside footprints (layer, text, board x,y; h text height)
J1: Top Overlay "1" at 18.5,34.05 h1 r90; Top Overlay "8" at 17,3.7 h1 r90; Top Overlay "16" at 5.75,5.3 h1 r90; Top Overlay "9" at 5.75,33.8 h1 r90